# Altium PCB PCB_NewSim_2_2023-07-09.pcbdoc (part 2 of 3)
Units mil, origin at the board's own origin, x right, y up, seen from the top; angles counter-clockwise.
Board outline 6950 x 7613.07 mil, 2 copper layers (Top Layer, Bottom Layer); 120 components, 161 nets, 571 pads, 250 vias.
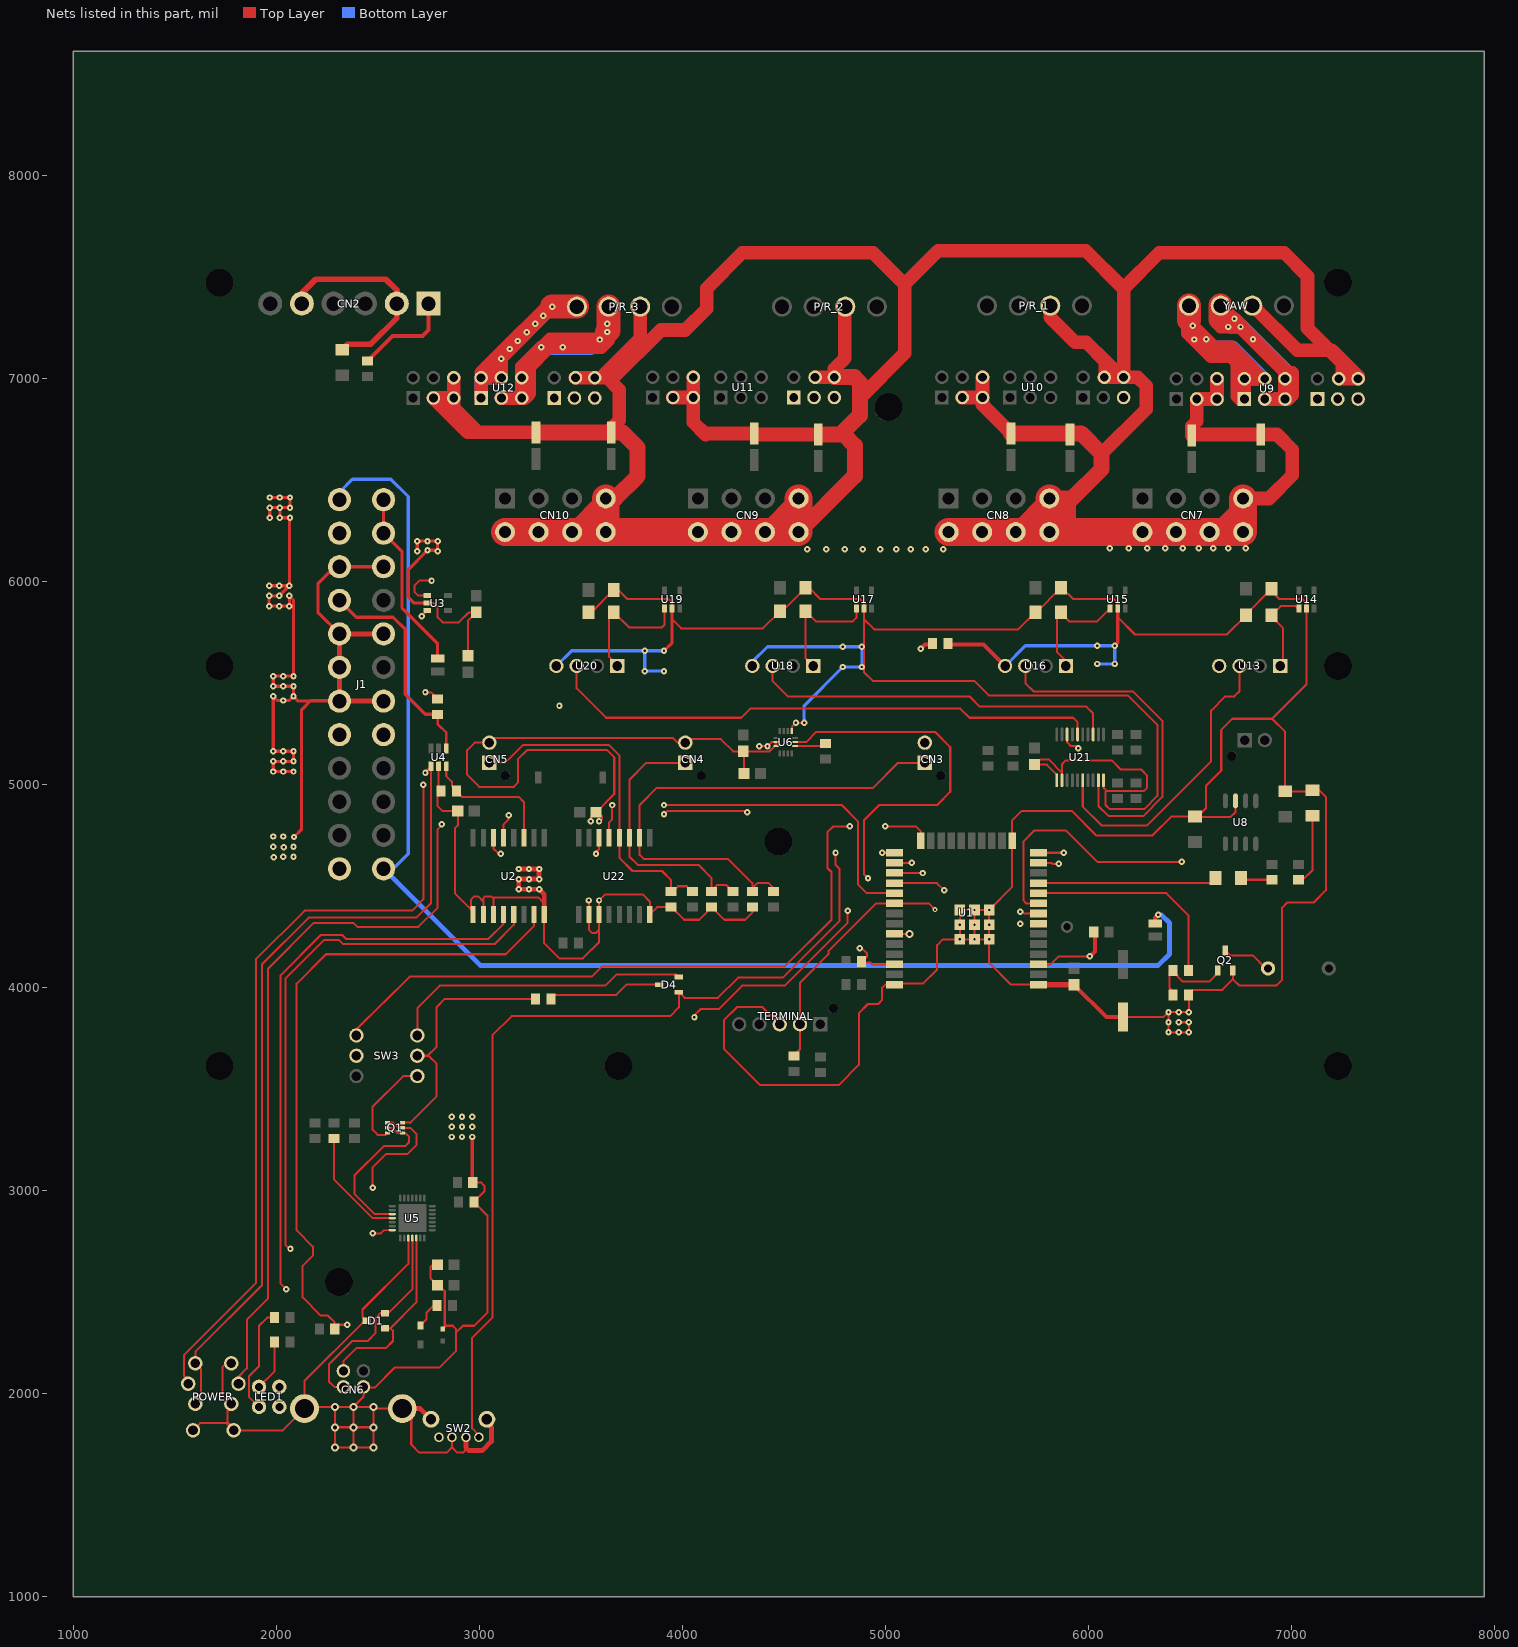
[diagram p2: the nets of this part, all layers, seen from the top]

## Via types
v1: diameter 31.5, hole 12, Top Layer to Bottom Layer, tented both sides, 239 vias
v2: diameter 39.37, hole 19.69, Top Layer to Bottom Layer, tented both sides, 10 vias
v3: diameter 24, hole 12, Top Layer to Bottom Layer, tented both sides, 1 vias

## Nets (pads, with @x,y where several pads share a name; then routed paths per layer and width w, separated by ;. In a path a pad name is that pad's centre, name@x,y a point inside that pad or via, vN(x,y) a via of type N, cw(c..) or ccw(c..) an arc to the next point about the centre after c; other vN are vias at no path point) (continued)
B_PR_PWM_A: U1.33 U11.13 | length 7931.2
  Top Layer w10: U1.33@5045.67,4265.49 v2(5120,4264.93)
  Mid-Layer 1 w10: U11.13@4549.06,6909.93 4549.06,6760.86 4610,6699.93 7220,6699.93 7320,6599.93 7320,5864.93 7390,5794.93 7390,5369.93 7315,5294.93 6710,5294.93 6640,5224.93 6640,4839.93 6560,4759.93 6460,4759.93 6250,4549.93 6250,3949.93 6195,3894.93 5905,3894.93 5785,4014.93 5370,4014.93 v2(5120,4264.93)
B_PR_PWM_B: U1.9 U11.15 | length 6853.5
  Top Layer w10: U1.9@5754.33,4415.5 5695,4414.93 5680,4429.93 5680,4719.93 5735,4774.93 5890,4774.93 6045,4619.93 v1(6460,4619.93)
  Mid-Layer 2 w10: U11.15@4649.06,6909.93 4649.06,6725.86 4745,6629.93 7085,6629.93 7200,6514.93 7200,5909.93 7040,5749.93 7040,5354.93 7085,5309.93 7175,5309.93 7225,5259.93 7225,4739.93 7095,4609.93 6470,4609.93 v1(6460,4619.93)
BUZZER: R25.2 U1.10 | length 1055.7
  Top Layer w10: U1.10@5754.33,4465.5 6384.4,4465.52 6493,4356.93 R25.2@6493.04,4084.93
C22_2: C22.2 U13.1 U14.1 | length 438
  Top Layer w10: U13.1@6945,5584.93 6960,5599.93 6960,5769.93 6902.7,5827.23 C22.2@6902.7,5834.93 6947.7,5879.93 7020,5879.93 7030.81,5869.11 U14.1@7037.6,5869.11
C24_2: C24.2 U15.1 U16.1 | length 582.7
  Top Layer w10: U16.1@5890,5584.93 5890,5609.93 5845,5654.93 5845,5829.73 C24.2@5865.2,5849.93 5865.2,5844.73 5905,5804.93 6043.41,5804.93 U15.1@6107.6,5869.11
C27_2: C27.2 U17.1 U18.1 | length 609.9
  Top Layer w10: U18.1@4645,5584.93 4607.7,5622.23 C27.2@4607.7,5854.93 4657.7,5804.93 4840,5804.93 4857.6,5822.52 U17.1@4857.6,5869.11
C29_2: C29.2 U19.1 U20.1 | length 658.7
  Top Layer w10: U20.1@3680,5584.93 3680,5589.93 3640,5629.93 3640,5827.23 C29.2@3662.7,5849.93 3737.7,5774.93 3900,5774.93 3912.6,5787.52 U19.1@3912.6,5869.11
C_OUT-A_PR: P/R_3.1 U12.7 U12.8 U12.10 | length 2637.3
  Top Layer w66.93: U12.7@3009.05,6904.93 U12.8@3009.05,7004.93 ; 3050.12,7070.05 3109.06,7011.11 U12.10@3109.05,7004.93 ; v1(3109.06,7097.57) 3109.06,7104.93 v1(3359.06,7354.93) ; P/R_3.1@3481.1,7354.93 3335,7354.93 3109.06,7128.98 ; U12.8@3009.05,7004.93 U12.10@3109.05,7004.93 ; U12.8@3009.05,7004.93 3009.06,7028.98 3109.06,7128.98 ; U12.8@3009.05,7004.93 U12.10@3109.05,7004.93 ; U12.10@3109.05,7004.93 3109.06,7128.98
  Top Layer w118.11: v1(3359.06,7354.93) P/R_3.1@3481.1,7354.93
  Bottom Layer w66.93: v1(3109.06,7097.57) U12.10@3109.05,7004.93 U12.8@3009.05,7004.93 ; P/R_3.1@3481.1,7354.93 v1(3359.06,7354.93) v1(3315.07,7310.94) v1(3275.74,7271.6) v1(3233.74,7229.6) v1(3189.74,7185.6) v1(3150.41,7146.27) U12.8@3009.05,7004.93 ; U12.8@3009.05,7004.93 U12.7@3009.05,6904.93 U12.8@3009.05,7004.93
C_OUT-B_PR: P/R_3.2 U12.9 U12.11 U12.12 | length 2999.3
  Top Layer w66.93: U12.9@3109.05,6904.93 U12.11@3209.05,6904.93 ; 3342.07,7154.93 3245,7057.86 3245,6924.93 3225,6904.93 U12.11@3209.05,6904.93 ; v1(3593.04,7192.97) 3591.09,7194.93 3350,7194.93 3310,7154.93 v1(3305,7154.93) ; U12.11@3209.05,6904.93 U12.12@3209.05,7004.93 3209.06,7058.98 v1(3305,7154.93) ; v1(3305,7154.93) 3549.14,7154.93 3637.1,7242.89 3637.1,7256.09 P/R_3.2@3637.1,7354.93 3635,7352.82 3635,7189.93 3600,7154.93 v1(3410.39,7154.93) v1(3305,7154.93)
  Top Layer w118.11: v1(3630,7229.93) 3637.1,7237.02 P/R_3.2@3637.1,7354.93
  Bottom Layer w66.93: U12.9@3109.05,6904.93 U12.11@3209.05,6904.93 U12.12@3209.05,7004.93 3209.06,7053.98 3305,7149.93 3550,7149.93 v1(3593.04,7192.97) v1(3630,7229.93) v1(3630,7270.52) 3630,7347.82 P/R_3.2@3637.1,7354.93
C_PR_PWM_A: U1.8 U12.13 | length 8583.6
  Top Layer w10: v1(5665,4374.93) 5675,4374.93 5685,4364.93 U1.8@5754.33,4365.5 5695,4364.93
  Mid-Layer 1 w10: U12.13@3369.1,6907.43 3369.1,6705.82 3430,6644.93 7185,6644.93 7260,6569.93 7260,5824.93 7335,5749.93 7335,5449.93 7285,5399.93 6720,5399.93 6530,5209.93 6530,4839.93 6430,4839.93 6185,4594.93 6185,3989.93 6155,3959.93 5945,3959.93 5730,4174.93 5730,4339.93 5690,4379.93 5670,4379.93 v1(5665,4374.93)
C_PR_PWM_B: U1.28 U12.15 | length 9178.4
  Top Layer w10: U1.28@5045.67,4515.49 5254.43,4515.49 v1(5290,4479.93)
  Mid-Layer 1 w10: U12.15@3469.1,6907.43 3469.1,6720.82 3510,6679.93 7200,6679.93 7290,6589.93 7290,5849.93 7365,5774.93 7365,5414.93 7290,5339.93 6710,5339.93 6610,5239.93 6610,4854.93 6550,4794.93 6455,4794.93 6215,4554.93 6215,3974.93 6175,3934.93 5920,3934.93 5650,4204.93 5650,4299.93 v1(5665,4314.93)
  Mid-Layer 2 w10: v1(5290,4479.93) 5310,4499.93 5575,4499.93 5615,4459.93 5615,4339.93 5640,4314.93 v1(5665,4314.93)
CN2_1: CN2.1 R6.1 | length 492.8
  Top Layer w19.68: R6.1@2450,7087.97 2571.96,7209.93 2720,7209.93 2749.73,7239.65 CN2.1@2749.73,7369.93
CN6_2: CN6.2 D1.1 U5.5 | length 931.6
  Top Layer w10: CN6.2@2330.79,2112.64 2330.79,2160.72 2395,2224.93 2540,2224.93 2575,2259.93 2575,2309.93 2562.4,2322.53 D1.1@2535.28,2322.52 2562.6,2322.53 2689.7,2450.22 2689.7,2746.03
CN6_3: CN6.3 D1.2 U5.4 | length 1025.3
  Top Layer w10: CN6.3@2330.79,2033.9 2286.03,2033.89 2260,2059.93 2260,2144.93 2375,2259.93 2450,2259.93 2490,2299.93 2490,2374.93 2512.4,2397.32 D1.2@2535.28,2397.33 2552.4,2397.32 2670,2514.93 U5.4@2669.99,2766.5
D4_2: D4.2 SW3.1 | length 1497.2
  Top Layer w10: SW3.1@2695,3764.93 2695,3899.93 2805,4009.93 3620,4009.93 3675,4064.93 3971.03,4064.93 D4.2@3983.62,4052.33
DAC2_AUDIO: C13.2 U1.11 | length 883.1
  Top Layer w10: U1.11@5754.33,4515.5 6602.87,4515.49 C13.2@6627.3,4539.93
DTR: Q1.2 Q1.4 U5.28 | length 956.3
  Top Layer w10: v1(2475,2789.93) 2515,2789.93 2530,2804.93 U5.28@2571.57,2805.82 ; v1(2475,3014.93) 2475,3114.93 2540,3179.93 2645,3179.93 2690,3224.93 2690,3279.93 2660,3309.93 Q1.2@2622.4,3309.93 2600,3309.93 2575,3334.93 Q1.4@2547.6,3335.51
  Mid-Layer 1 w10: v1(2475,2789.93) 2515,2829.93 2515,2999.93 2500,3014.93 v1(2475,3014.93)
ESP_EN: Q1.6 R3.1 SW3.3 U1.3 U3.1 | length 8000.7
  Top Layer w10: Q1.6@2547.6,3284.34 2538.2,3274.93 2500,3274.93 2475,3299.93 2475,3414.82 2624.9,3564.93 SW3.3@2695,3564.93 ; U3.1@2743.82,5932.33 2697.4,5932.32 2680,5949.73 2680,5979.93 2705,6004.93 v1(2765,6004.93) ; v1(4060,3854.93) 4060,3864.93 4090,3894.93 4180,3894.93 4295,4009.93 4505,4009.93 4815,4319.93 v1(4815,4379.93) ; U1.3@5754.33,4115.5 5815,4114.93 5855,4154.93 v1(6008.04,4154.93)
  Top Layer w19.68: v1(6008.04,4154.93) 6031.96,4178.85 R3.1@6031.96,4269.93
  Mid-Layer 1 w10: v1(2765,6004.93) 2920,5849.93 2920,4099.93 2880.5,4060.43 2680.5,4060.43 2605,3984.93 2605,3594.93 2635,3564.93 SW3.3@2695,3564.93 2805,3564.93 2840,3599.93 2840,3844.93 2890,3894.93 3465,3894.93 3505,3854.93 v1(4060,3854.93) ; v1(4815,4379.93) 4865,4429.93 5900,4429.93 6008.04,4321.89 v1(6008.04,4154.93)
EXT_5V: D2.1 R18.1 | length 142.7
  Top Layer w10: D2.1@2710,2336.09 2740,2366.09 2740,2399.93 2775,2434.93 R18.1@2791.96,2434.93
GND: C1.1 C2.1 C3.2 C4.2 C5.1 C6.1 C7.1 C8.1 C9.1 C10.2 C11.2 C12.2 C14.2 C15.2 C16.2 C17.2 C18.2 C19.2 C20.2 C21.2 C22.1 C23.2 C24.1 C25.2 C26.2 C27.1 C28.2 C29.1 C30.2 C31.2 C32.2 CN2.2 CN2.5 CN3.2 CN4.2 CN5.2 CN6.4 CN6.5 CN7.4 CN7.5 CN7.6 CN7.7 CN7.8 CN8.4 CN8.5 CN8.6 CN8.7 CN8.8 CN9.4 CN9.5 CN9.6 CN9.7 CN9.8 CN10.4 CN10.5 CN10.6 CN10.7 CN10.8 D1.3 D3.1 J1.3 J1.5 J1.7 J1.15 J1.17 J1.18 J1.19 J1.24 P/R_1.3 P/R_2.3 P/R_3.3 POWER.1 POWER.2 POWER.5 POWER.6 Q2.2 R13.1 R19.1 R20.1 R26.1 R36.1 R37.1 R38.1 R39.1 SW2.2 SW2.3 SW2.5 SW2.6 TERMINAL.3 U1.1 U1.15 U1.38 U1.39 U2.1 U2.2 U2.3 U2.8 U3.2 U4.2 U5.3 U6.1 U6.6 U6.7 U8.7 U9.3 U9.5 U9.6 U9.16 U9.18 U10.3 U10.5 U10.6 U10.16 U10.18 U11.3 U11.5 U11.6 U11.16 U11.18 U12.3 U12.5 U12.6 U12.16 U12.18 U13.4 U14.2 U15.2 U16.4 U17.2 U18.4 U19.2 U20.4 U21.1 U21.2 U21.10 U22.2 U22.3 U22.8 YAW.3 | length 79127.2
  Top Layer w10: POWER.6@1589.99,1819.97 1624.96,1854.92 1765,1854.92 1790,1829.92 POWER.5@1789.99,1819.97 ; POWER.1@1778.57,2149.89 1754.96,2149.89 1735,2129.93 1735,1993.47 POWER.2@1778.57,1949.88 1778.59,1933.52 1760,1914.92 1760,1849.96 POWER.5@1789.99,1819.97 ; U5.3@2650.29,2766.5 2650.3,2640.22 2425,2414.93 2425,2379.64 D1.3@2444.73,2359.93 2435,2359.93 2139.2,2064.12 CN6.5@2139.2,1927.2 ; U3.2@2743.82,5894.93 2775,5894.93 2795,5874.93 2795,5824.93 2820,5799.93 2900,5799.93 2949.45,5849.38 C5.1@2985,5849.37 2945,5809.38 C1.1@2945,5635.48 ; C7.1@2794.45,2634.93 2770,2634.93 2760,2624.93 2760,2569.38 C6.1@2794.45,2534.93 2800,2534.93 2830,2504.93 2830,2329.45 D3.1@2820,2319.45 ; U4.2@2800,5091.62 2800,4981.89 R13.1@2811.96,4969.93 2811.96,4956.89 2795,4939.93 2795,4894.93 2820,4869.93 C3.2@2894.45,4869.93 2894.4,4799.43 2880,4784.93 2880,4464.93 2970,4374.93 U2.1@2970,4360.95 ; D3.1@2820,2319.43 2835.5,2334.93 2870,2334.93 2885,2319.93 2885,2209.93 ; SW2.2@2865.55,1785.63 2865.55,1735.47 ; SW2.3@2934.44,1785.63 2934.45,1724.38 2920,1709.92 2891.1,1709.92 2865.55,1735.47 ; U2.1@2960,4384.93 2960,4434.93 2975,4449.93 2995,4449.93 3020,4424.93 U2.2@3020,4360.95 3020,4439.93 3030,4449.93 3060,4449.93 3070,4439.93 ; R19.1@2968.04,3039.93 3010,3039.93 3025,3024.93 3025,2996.12 R20.1@2973.04,2944.93 ; R20.1@2973.04,2944.93 3040,2877.97 3040,2399.93 2975,2334.93 2920,2334.93 2885,2299.93 2885,2209.93 ; U2.3@3070,4360.95 3070,4439.93 ; CN10.5@3126.97,6244.74 3292.32,6244.74 3457.68,6244.74 3623.03,6244.74 CN10.4@3623.03,6410.1 ; C29.1@3537.3,5849.93 3552.7,5849.93 C28.2@3662.7,5959.93 3685,5959.93 3730,5914.93 3930,5914.93 3950,5894.93 U19.2@3950,5869.11 3950,5814.93 3995,5769.93 4397.3,5769.93 C27.1@4482.3,5854.93 4492.7,5854.93 C26.2@4607.7,5969.93 4625,5969.93 4680,5914.93 4875,5914.93 4895,5894.93 U17.2@4895,5869.11 ; U22.2@3540,4360.95 3540,4284.93 3555,4269.93 3575,4269.93 3590,4284.93 U22.3@3590,4360.95 v1(3590,4429.93) 3620,4459.93 3805,4459.93 3840,4424.93 U22.8@3840,4360.95 ; U22.2@3540,4360.95 v1(3540,4429.93) ; v1(3550,4819.93) 3550,4839.32 C30.2@3575.55,4864.93 ; U22.3@3590,4360.95 3590,4224.93 3510,4144.93 3395,4144.93 3320,4219.93 U2.8@3320,4360.95 3320,4414.93 3290,4444.93 3075,4444.93 3070,4439.93 ; v1(3590,4819.93) 3605,4829.93 3605,4844.93 C30.2@3575.55,4864.93 ; CN10.8@3623,6244.73 CN9.5@4077,6244.77 CN9.6@4242.35,6244.77 CN9.7@4407.71,6244.77 CN9.8@4573.06,6244.77 CN9.4@4573.06,6410.12 ; U22.8@3840,4360.95 3875.94,4396.89 R38.1@3945,4396.88 3947,4396.93 4008.9,4334.93 4083,4334.93 R37.1@4145,4396.88 4206.96,4334.93 4310,4334.93 4345,4369.93 R36.1@4345,4396.88 ; C9.1@4304.45,5054.93 4304.45,5159.93 C8.1@4300,5164.37 ; v1(4380,5189.93) v1(4420,5189.93) 4440,5209.93 U6.6@4464.82,5209.93 U6.7@4464.82,5190.24 ; U6.6@4459.8,5209.93 4459.8,5194.73 4429.5,5164.43 C8.1@4300,5164.37 ; TERMINAL.3@4480,3819.93 4395,3904.93 4270,3904.93 4205,3839.93 4205,3699.93 4385,3519.93 4770,3519.93 4870,3619.93 4870,3874.93 4915,3919.93 4965,3919.93 4985,3939.93 4985,3999.93 5000.6,4015.53 U1.38@5045.67,4015.49 ; U6.1@4539.53,5264.94 4539.53,5284.45 v1(4560,5304.93) v1(4600,5304.93) ; U1.38@5045.67,4015.49 5050.1,4019.93 5185,4019.93 5255,4089.93 5255,4209.93 5283.6,4238.52 v1(5367.12,4238.52) ; U1.15@5625,4724.32 5625,4824.93 5670,4869.93 5920,4869.93 6040,4749.93 6315,4749.93 6407.7,4842.62 C11.2@6525,4842.62 ; U1.15@5624.99,4724.35 5625,4496.4 v1(5511.61,4383.02) ; U1.1@5754.33,4015.5 5619.43,4015.49 5511.61,4123.31 v1(5511.61,4238.52) ; U21.1@5844.84,5021.89 5844.84,5050.09 5795.55,5099.38 C31.2@5735,5099.37 5739.45,5099.38 5765,5124.93 5805,5124.93 5870,5059.93 U21.2@5870.43,5021.89 ; U21.2@5870.43,5021.89 5870.4,5100.32 5890,5119.93 6115,5119.93 6160,5074.93 6260,5074.93 6290,5044.93 6290,4984.93 6275,4969.93 6090,4969.93 ; U21.10@6075.16,5021.89 6075,4984.93 6090,4969.93 ; C32.2@6170,3855.2 6370.28,3855.21 v1(6395,3879.93) ; v1(6445,3829.93) v1(6495,3829.93) v1(6495,3779.93) v1(6445,3779.93) v1(6395,3779.93) v1(6395,3829.93) v1(6395,3879.93) ; Q2.2@6712.4,4085.72 6712.4,4042.32 ; U8.7@6725,4920.53 6725,4864.93 6700,4839.93 6527.7,4839.93 C11.2@6525,4842.62 ; POWER.5@1789.99,1819.97 2031.95,1819.95 CN6.5@2139.2,1927.2 ; CN6.5@2139.2,1927.2 2146.92,1934.92 v2(2290,1934.92) ; v2(2290,1834.92) v2(2380,1834.92) ; v2(2290,1834.92) v2(2290,1734.92) v2(2380,1734.92) ; v2(2290,1834.92) v2(2290,1934.92) ; v2(2290,1934.92) v2(2380,1934.92) ; v2(2380,1734.92) v2(2380,1834.92) ; v2(2380,1734.92) v2(2480,1734.92) v2(2480,1834.92) ; v2(2380,1834.92) v2(2380,1934.92) ; v2(2380,1834.92) v2(2480,1834.92) ; v2(2380,1934.92) 2429.21,1984.13 CN6.4@2429.21,2033.9 2433.2,2029.92 2485,2029.92 2585,2129.93 2805,2129.93 2885,2209.93 ; v2(2380,1934.92) v2(2480,1934.92) ; v2(2480,1834.92) v2(2480,1934.92) ; v2(2480,1934.92) 2487.72,1927.2 CN6.5@2620.8,1927.2 2665,1883.01 2665,1749.92 2705,1709.92 2840,1709.92 2865.55,1735.47 ; C30.2@3575.55,4864.93 3665,4954.43 3665,5134.93 3630,5169.93 3235,5169.93 3190,5124.93 3190,5009.93 3170,4989.93 3000,4989.93 2940,5049.93 2940,5169.93 2977.5,5207.43 CN5.2@3050,5207.43 3072.5,5229.93 3955,5229.93 3977.5,5207.43 CN4.2@4015,5207.43 4032.5,5224.93 4190,5224.93 4250.55,5164.38 C8.1@4300,5164.37 ; U17.2@4895,5869.11 4895,5554.93 4940,5509.93 5440,5509.93 5510,5439.93 6195,5439.93 6340,5294.93 6340,4944.93 6275,4879.93 6105,4879.93 6085,4899.93 6085,4964.93 6090,4969.93 ; U17.2@4895,5869.11 4895,5814.93 4945,5764.93 5654.8,5764.93 C24.1@5739.8,5849.93 5745.2,5849.93 C25.2@5865.2,5969.93 5870,5969.93 5925,5914.93 6125,5914.93 6145,5894.93 U15.2@6145,5869.11 6145,5824.93 6230,5739.93 6682.3,5739.93 C22.1@6777.3,5834.93 6777.3,5839.52 C23.2@6902.7,5964.93 6902.7,5952.23 6940,5914.93 7055,5914.93 7075,5894.93 U14.2@7075,5869.11 7075,5494.93 6905,5324.93 ; v1(5367.12,4238.52) v1(5367.12,4310.77) v1(5367.12,4383.02) v1(5439.37,4383.02) ; v1(5367.12,4238.52) v1(5439.37,4238.52) ; v1(5439.37,4238.52) v1(5511.61,4238.52) ; v1(5439.37,4238.52) v1(5439.37,4310.78) v1(5439.37,4383.02) ; v1(5439.37,4383.02) v1(5511.61,4383.02) ; v1(5511.61,4238.52) v1(5511.61,4310.77) v1(5511.61,4383.02) ; v1(6395,3879.93) v1(6445,3879.93) v1(6495,3879.93) 6495,3962.97 R26.1@6493.04,3964.93 6518.04,3989.93 6660,3989.93 6712.4,4042.32 ; C11.2@6525,4842.62 6537.7,4842.62 6580,4884.93 6580,4994.93 6655,5069.93 6655,5269.93 6710,5324.93 6905,5324.93 ; 6712.4,4042.32 6744.8,4009.93 6925,4009.93 6955,4039.93 6955,4394.93 6980,4419.93 7110,4419.93 7170,4479.93 7170,4939.93 7137.3,4972.62 C12.2@7105,4972.62 7100,4967.62 C10.2@6970,4967.62 6970,5259.93 6905,5324.93
  Top Layer w15.75: v1(1965,5979.93) v1(2015,5979.93) v1(2065,5979.93) ; v1(1967.85,6314.85) v1(1967.85,6364.85) v1(2017.85,6364.85) ; v1(1967.85,6414.85) v1(2017.85,6414.85) v1(2067.85,6414.85) v1(2067.85,6364.85) v1(2017.85,6364.85) ; v1(2085,5064.93) v1(2035,5064.93) v1(1985,5064.93) v1(1985,5114.93) v1(2035,5114.93) v1(2085,5114.93) v1(2085,5164.93) v1(2035,5164.93) v1(1985,5164.93) v1(1985,5434.93) 2005,5414.93 v1(2035,5414.93) 2065,5414.93 v1(2085,5434.93) ; v1(2087.5,4742.43) 2125,4779.93 2125,5369.93 2170,5414.93 2308.5,5414.93 J1.19@2311.5,5411.93 2108,5411.93 v1(2085,5434.93) ; J1.17@2311.5,5742.93 2205,5849.43 2205,5989.93 2289,6073.93 J1.15@2311.5,6073.93 J1.3@2528.5,6073.93 ; v1(2695,6149.93) v1(2695,6199.93) v1(2745,6199.93) v1(2795,6199.93) v1(2795,6149.93) 2790,6154.93 v1(2745,6154.93) 2650,6059.93 2650,5924.93 2680,5894.93 U3.2@2743.82,5894.93 ; v1(2965,3264.93) 2965,3042.97 R19.1@2968.04,3039.93 ; v1(3910,5659.93) 3950,5699.93 U19.2@3950,5869.11 ; v1(6130,5684.93) 6145,5699.93 U15.2@6145,5869.11 ; v1(2017.85,6364.85) v1(2017.85,6314.85) v1(2067.85,6314.85) 2065,6311.99 v1(2065,5979.93) ; v1(2065,5979.93) v1(2015,5929.93) v1(1965,5929.93) v1(1965,5879.93) v1(2015,5879.93) v1(2065,5879.93) v1(2065,5929.93) 2085,5909.93 v1(2085,5534.93) v1(2035,5534.93) v1(1985,5534.93) v1(1985,5484.93) v1(2035,5484.93) v1(2085,5484.93) v1(2085,5434.93)
  Top Layer w19.68: R39.1@5313.04,5689.93 5485,5689.93 U16.4@5590,5584.93 ; C2.1@5930,4014.37 6089.17,3855.21 C32.2@6170,3855.2
  Top Layer w23.62: J1.7@2528.5,5411.93 J1.19@2311.5,5411.93 J1.18@2311.5,5577.93 J1.17@2311.5,5742.93 J1.5@2528.5,5742.93 ; CN6.5@2620.8,1927.2 2709.22,1927.2 SW2.6@2762.2,1874.22 ; SW2.3@2934.44,1785.63 2934.45,1733.5 2948.02,1719.92 3015,1719.92 3060,1764.92 3060,1834.92 3037.8,1857.12 SW2.5@3037.79,1874.22 ; v1(3195,4584.93) v1(3245,4584.93) v1(3295,4584.93) v1(3295,4534.93) v1(3245,4534.93) v1(3195,4534.93) v1(3195,4484.93) v1(3245,4484.93) v1(3295,4484.93) 3320,4459.93 U2.8@3320,4360.95
  Top Layer w27.56: C4.2@2325,7142.62 2352.3,7169.93 2465,7169.93 2593.82,7298.74 CN2.2@2593.82,7369.93 ; U1.1@5754.33,4015.5 5755.45,4014.38 C2.1@5930,4014.37
  Top Layer w29.53: CN2.5@2126.11,7369.93 2126.11,7421.03 2195,7489.93 2540,7489.93 2595,7434.93 2595,7371.1 CN2.2@2593.82,7369.93
  Top Layer w66.93: U12.5@2874.05,6904.93 2874.1,6855.82 2995.4,6735.32 C20.2@3279.98,6735.3 2943.68,6735.31 U12.3@2774.05,6904.93 U12.5@2874.05,6904.93 ; U12.16@3474.05,7004.93 U12.18@3569.05,7004.93 ; U12.18@3569.05,7004.93 3600,7004.93 3793,7197.93 P/R_3.3@3793,7354.93 ; C21.2@3649.98,6735.3 3650,6754.93 3690,6794.93 3690,6944.93 3630,7004.93 U12.18@3569.05,7004.93 ; U11.3@3954.05,6907.43 U11.5@4054.05,6907.43 ; U11.6@4054.05,7007.43 U11.5@4054.05,6907.43 ; U11.16@4654.05,7007.43 U11.18@4749.05,7007.43 4749.06,7048.98 4800,7099.93 4800,7351.93 P/R_2.3@4803,7354.93 ; C18.2@4669.98,6725.3 4360,6725.31 C19.2@4354.98,6730.3 4120.38,6730.31 4115,6724.93 4054.06,6785.86 U11.5@4054.05,6907.43 ; 4875,6819.93 4875,6904.93 5095,7124.93 5095,7464.93 ; U10.3@5379.06,6907.43 U10.5@5479.06,6907.43 ; C17.2@5619.98,6730.3 5479.06,6871.24 U10.5@5479.06,6907.43 ; P/R_1.3@5813,7359.93 5813,7301.93 5935,7179.93 5990,7179.93 6085,7084.93 ; 6065,6629.93 6285,6849.93 6285,6964.93 6242.5,7007.43 U10.18@6174.05,7007.43 ; U9.6@6634.06,6999.93 U9.5@6634.06,6899.93 U9.3@6534.06,6899.93 6534.06,6789.93 6510,6765.86 C14.2@6509.98,6720.3 6515,6725.31 C15.2@6849.98,6725.3 6929.6,6725.32 7005,6649.93 7005,6524.93 6890,6409.93 CN7.4@6763.06,6410.12 ; YAW.3@6808,7359.93 6810,7359.93 7030,7139.93 7200,7139.93 7250,7089.93 ; U12.5@2874.05,6904.93 U12.6@2874.05,7004.93 U12.5@2874.05,6904.93 ; U12.18@3569.05,7004.93 3660,7004.93 3895,7239.93 4015,7239.93 4120,7344.93 4120,7444.93 4295,7619.93 4940,7619.93 5095,7464.93 ; 5095,7464.93 5260,7629.93 5988.12,7629.93 6174.06,7443.98 ; U10.5@5479.06,6907.43 U10.6@5479.06,7007.43 U10.5@5479.06,6907.43 ; 6085,7084.93 6162.5,7007.43 U10.18@6174.05,7007.43 ; 6085,7084.93 6085,7013.36 U10.16@6079.05,7007.43 U10.18@6174.05,7007.43 ; U10.18@6174.05,7007.43 6174.06,7443.98 ; 6174.06,7443.98 6350,7619.93 6965,7619.93 7080,7504.93 7080,7248.98 U9.18@7329.05,6999.93 ; 7250,7089.93 7329.06,7010.86 U9.18@7329.05,6999.93 ; 7250,7089.93 7250,7015.86 U9.16@7234.05,6999.93 U9.18@7329.05,6999.93
  Top Layer w78.74: C20.2@3279.98,6735.3 C21.2@3649.98,6735.3 3704.6,6735.32 3780,6659.93 3780,6519.93 3670.2,6410.12 CN10.4@3623,6410.12 ; CN10.7@3457.68,6244.74 CN10.4@3623.03,6410.1 ; CN9.7@4407.71,6244.77 CN9.4@4573.06,6410.12 ; CN9.8@4573.06,6244.77 4850,6521.72 4850,6669.93 4794.62,6725.3 C18.2@4669.98,6725.3 4780.38,6725.3 4875,6819.93 4875,6979.93 4847.5,7007.43 U11.18@4749.05,7007.43 ; C17.2@5619.98,6730.3 5964.62,6730.3 6065,6629.93 6065,6554.93 5920.2,6410.12 ; CN8.7@5642.71,6244.77 CN8.4@5808.06,6410.12 ; 5900,6319.93 5900,6389.93 5920.2,6410.12 ; CN7.7@6619.65,6234.57 CN7.4@6785,6399.93 ; CN8.4@5808.06,6410.12 5920.2,6410.12 ; CN8.4@5808.06,6410.12 5920.2,6410.12
  Top Layer w137.79: CN10.5@3126.97,6244.74 3292.32,6244.74 3457.68,6244.74 3623.03,6244.74 CN10.4@3623.03,6410.1 ; CN10.8@3623,6244.73 CN9.5@4077,6244.77 CN9.6@4242.35,6244.77 CN9.7@4407.71,6244.77 CN9.8@4573.06,6244.77 CN9.4@4573.06,6410.12 ; CN8.5@5312,6244.77 CN8.6@5477.35,6244.77 CN8.7@5642.71,6244.77 CN8.8@5808.06,6244.77 ; CN7.4@6763.06,6410.12 CN7.8@6763.06,6244.77 CN7.7@6597.71,6244.77 CN7.6@6432.35,6244.77 CN7.5@6267,6244.77 CN8.8@5808.06,6244.77 ; CN8.8@5808.06,6244.77 CN8.4@5808.06,6410.12 CN8.8@5808.06,6244.77
  Mid-Layer 1 w10: v1(4380,5189.93) 4380,5224.93 4460,5304.93 v1(4560,5304.93)
  Mid-Layer 2 w10: v1@2067.9,6414.82 2126.1,6473.02 CN2.5@2126.11,7369.93 ; J1.3@2528.5,6073.93 2865,6074.93 2900,6039.93 2895,5362.43 CN5.2@3050,5207.43 3062.5,5207.43 3175,5319.93 3902.5,5319.93 CN4.2@4015,5207.43 4015,5214.93 4140,5339.93 5062.5,5339.93 CN3.2@5195,5207.43 ; U20.4@3380,5584.93 3457.68,5662.6 CN10.7@3457.68,6244.74 ; v1(3540,4429.93) 3520,4449.93 3520,4779.93 3550,4809.93 v1(3550,4819.93) ; v1(3590,4429.93) 3600,4429.93 3630,4459.93 3630,4779.93 v1(3590,4819.93) ; U18.4@4345,5584.93 4407.71,5647.64 CN9.7@4407.71,6244.77 ; U16.4@5590,5584.93 5642.71,5637.64 CN8.7@5642.71,6244.77 ; CN7.7@6597.71,6244.77 6597.71,5632.22 U13.4@6645,5584.93
  Mid-Layer 2 w15.75: J1.3@2528.5,6073.93 2604.5,6149.93 v1(2795,6149.93) 2790,6154.93 v1(2745,6154.93) 2740,6149.93 v1(2695,6149.93) 2619,6073.93 J1.3@2528.5,6073.93
  Mid-Layer 2 w23.62: POWER.1@1778.57,2149.89 1870,2241.3 1870,4524.93 v1(1987.5,4642.43) 2032.5,4642.43 v1(2035,4644.93) v1(2037.5,4692.43) ; J1.24@2311.5,4585.93 2144,4585.93 v1(2085,4644.93) v1(2085,4694.93) ; v1(2037.5,4692.43) 1987.5,4692.43 v1(1985,4694.93) v1(1985,4744.93) v1(2035,4744.93) 2085,4744.93 v1(2087.5,4742.43) 2087.5,4697.43 v1(2085,4694.93) ; v1(2037.5,4692.43) 2040,4694.93 v1(2085,4694.93)
  Bottom Layer w15.75: U20.4@3380,5584.93 3455,5659.93 v1(3815,5659.93) ; v1(3910,5559.93) v1(3815,5559.93) v1(3815,5659.93) ; v1(3910,5659.93) v1(3815,5659.93) ; U18.4@4345,5584.93 4345,5604.93 4420,5679.93 v1(4790,5679.93) v1(4885,5679.93) v1(4885,5579.93) v1(4790,5579.93) 4600,5389.93 v1(4600,5304.93) ; U16.4@5590,5584.93 5690,5684.93 v1(6045,5684.93) v1(6130,5684.93) v1(6130,5594.93) v1(6045,5594.93)
  other v1: 2865,3264.93 2915,3264.93 2865,3314.93 2915,3314.93 2965,3314.93 2865,3364.93 2915,3364.93 2965,3364.93 4615,6159.93 4710,6159.93 4800,6159.93 4890,6159.93 4975,6159.93 5055,6159.93 5125,6159.93 5200,6159.93 5285,6159.93 6105,6164.93 6200,6164.93 6290,6164.93 6380,6164.93 6465,6164.93 6545,6164.93 6615,6164.93 6690,6164.93 6775,6164.93
GND1: 
GPIO0: D4.1 SW2.4 SW3.5 U1.25 | length 7104.2
  Top Layer w10: SW2.4@2998.42,1785.63 2998.4,1796.53 2965,1829.92 2965,2274.93 3065,2374.93 3065,3764.93 3160,3859.93 3940,3859.93 3983.6,3903.53 D4.1@3983.62,3977.52 4011.2,3949.93 4175,3949.93 4275,4049.93 4495,4049.93 4775,4329.93 4775,4584.93 4755,4604.93 v1(4755,4664.93) ; v1(4985,4664.93) U1.25@5045.67,4665.49
  Mid-Layer 1 w10: SW3.5@2395,3664.93 2310,3664.93 2285,3639.93 2285,3494.93 2410,3369.93 2410,2384.93 2500,2294.93 2765,2294.93 2895,2164.93 2895,1894.92 2998.4,1791.53 SW2.4@2998.42,1785.63 ; v1(4755,4664.93) v1(4985,4664.93)
GPIO2: SW3.4 U1.24 | length 3559.7
  Top Layer w10: SW3.4@2395,3764.93 2395.2,3795.72 2657.3,4054.93 3555,4054.93 3605,4104.93 4505,4104.93 4735,4334.93 4735,4569.93 4715,4589.93 4715,4764.93 4745,4794.93 v1(4825,4794.93) ; v1(5000,4794.93) 5150,4794.93 5175,4769.93 U1.24@5174.99,4724.35
  Mid-Layer 1 w10: v1(4825,4794.93) v1(5000,4794.93)
INT_ENC_EN: U1.29 U22.13 | length 1919.5
  Top Layer w10: U22.13@3640,4738.9 3640,4814.93 3655,4829.93 v1(3655,4899.93) ; v1(3910,4899.93) 4785,4899.93 4865,4819.93 4865,4509.93 4909.4,4465.52 U1.29@5045.67,4465.49
  Mid-Layer 1 w10: v1(3655,4899.93) v1(3910,4899.93)
INT_IO: U1.26 U2.13 | length 2493.1
  Top Layer w10: U2.13@3120,4738.9 3120,4804.93 3145,4829.93 v1(3145,4849.93) ; v1(3910,4854.93) 3925,4869.93 4320,4869.93 v1(4320,4864.93) ; U1.26@5045.67,4615.49 v1(5130,4614.93)
  Mid-Layer 1 w10: v1(3145,4849.93) 3210,4784.93 3845,4784.93 3910,4849.93 v1(3910,4854.93) ; v1(4320,4864.93) 5100,4864.93 5125,4839.93 5125,4619.93 v1(5130,4614.93)
J1_1: J1.1 J1.2 SW1.1 | length 891.8
  Top Layer w15.75: J1.1@2528.5,6403.93 J1.2@2528.5,6238.93 2620,6147.43 2620,5869.93 2795,5694.93 SW1.1@2795,5622.52
J1_12: J1.12 J1.13 SW4.1 | length 6716.3
  Top Layer w23.62: SW4.1@6330,4317.52 6330,4344.93 v1(6345,4359.93)
  Bottom Layer w15.75: J1.13@2311.5,6403.93 2311.5,6441.43 2375,6504.93 2565,6504.93 2650,6419.93 2650,4659.93 2576,4585.93 J1.12@2528.5,4585.93
  Bottom Layer w23.62: J1.12@2528.5,4585.93 3004.5,4109.93 6345,4109.93 6400,4164.93 6400,4319.93 6360,4359.93 v1(6345,4359.93)
J1_14: J1.14
J1_20: J1.20
LED_A: LED1.2 U2.4 | length 3323.8
  Top Layer w10: v1(2050,2514.93) 2020,2544.93 2020,4059.93 2220,4259.93 2325,4259.93 2345,4239.93 3045,4239.93 3120,4314.93 U2.4@3120,4360.95
  Mid-Layer 1 w10: LED1.2@2015,2034.14 2025,2044.13 2025,2494.93 2045,2514.93 v1(2050,2514.93)
LED_B: LED1.4 U2.5 | length 3498.3
  Top Layer w10: v1(2070,2714.93) 2065,2714.93 2045,2734.93 2045,4044.93 2235,4234.93 2310,4234.93 2330,4214.93 3075,4214.93 3170,4309.93 U2.5@3170,4360.95
  Mid-Layer 1 w10: LED1.4@2015,1935.71 1999.21,1935.71 1965,1969.92 1965,2609.93 v1(2070,2714.93)
MODEBTN: U1.7
MOTOR_ENABLE: R39.2 U1.27 U9.17 U10.17 U11.17 U12.17 | length 11788.7
  Top Layer w10: U1.27@5045.67,4565.49 v1(5185,4564.93)
  Top Layer w19.68: v1(5175,5669.93) 5195,5689.93 R39.2@5236.96,5689.93
  Mid-Layer 1 w7.87: U12.17@3569.06,6907.43 3565,6903.36 3565,6819.93 3620,6764.93 4390,6764.93 4460,6834.93 4460,6929.93 4485,6954.93 4715,6954.93 4749.06,6920.86 U11.17@4749.05,6907.43 ; U11.17@4749.05,6907.43 4749.1,6805.82 4805,6749.93 5235,6749.93 5280,6794.93 6120,6794.93 6174.1,6849.02 U10.17@6174.05,6907.43
  Mid-Layer 1 w10: U10.17@6174.05,6907.43 6301.6,6779.93 7310,6779.93 7330,6799.93 U9.17@7329.05,6899.93
  Mid-Layer 2 w10: U11.17@4749.05,6907.43 4751.6,6904.93 4795,6904.93 4845,6954.93 4845,7049.93 4795,7099.93 4540,7099.93 4475,7034.93 4475,6689.93 4630,6534.93 5045,6534.93 5165,6414.93 5165,5679.93 v1(5175,5669.93) 5505,5339.93 6335,5339.93 6530,5144.93 6530,4999.93 6685,4844.93 7060,4844.93 7120,4784.93 7120,4679.93 7080,4639.93 6535,4639.93 6500,4674.93 6130,4674.93 6015,4789.93 5715,4789.93 5475,4549.93 5190,4549.93 5185,4554.93 v1(5185,4564.93)
OUT-A_YAW: U9.7 U9.8 U9.10 YAW.1 | length 4286.3
  Top Layer w59.05: U9.8@6769.06,6999.93 U9.10@6869.06,6999.93 U9.8@6769.06,6999.93
  Top Layer w66.93: 6490,7291.02 6490,7224.93 v1(6521.64,7193.28) 6603.02,7111.91 6701.78,7111.91 ; YAW.1@6496.1,7359.93 6495,7358.82 6495,7259.93 v1(6515,7259.93) v1(6580.31,7194.61) 6620,7154.93 6705,7154.93 6769.1,7090.82 U9.8@6769.06,6999.93 ; 6658.77,7154.93 6735,7078.69 6735,6914.93 6750,6899.93 U9.7@6769.06,6899.93 ; 6769.06,7055.76 U9.8@6769.06,6999.93 ; 6769.06,7090.86 6860,6999.93 U9.10@6869.06,6999.93 U9.8@6769.06,6999.93 ; U9.7@6769.06,6899.93 U9.8@6769.06,6999.93 ; U9.7@6769.06,6899.93 U9.8@6769.06,6999.93
  Top Layer w118.11: 6495,7289.93 6496.1,7291.02 YAW.1@6496.1,7359.93
  Mid-Layer 1 w66.93: U9.7@6769.06,6899.93 U9.8@6769.06,6999.93 ; U9.8@6769.06,6999.93 U9.10@6869.06,6999.93 U9.8@6769.06,6999.93
  Mid-Layer 2 w66.93: YAW.1@6496.1,7359.93 6500,7356.02 6500,7244.93 6595,7149.93 6705,7149.93 6769.06,7085.86 ; U9.8@6769.06,6999.93 U9.7@6769.06,6899.93 U9.8@6769.06,6999.93 ; U9.8@6769.06,6999.93 6769.06,7085.86 ; U9.8@6769.06,6999.93 U9.10@6869.06,6999.93 ; U9.8@6769.06,6999.93 U9.10@6869.06,6999.93 ; 6769.06,7085.86 6855,6999.93 U9.10@6869.06,6999.93
  Bottom Layer w66.93: YAW.1@6496.1,7359.93 6496.1,7258.82 6600,7154.93 6710,7154.93 6769.1,7095.82 ; U9.7@6769.06,6899.93 U9.8@6769.06,6999.93 ; U9.8@6769.06,6999.93 6769.1,7095.82 ; U9.8@6769.06,6999.93 U9.10@6869.06,6999.93 ; U9.8@6769.06,6999.93 U9.10@6869.06,6999.93 ; 6769.1,7095.82 6865,6999.93 U9.10@6869.06,6999.93
OUT-B_YAW: U9.9 U9.11 U9.12 YAW.2 | length 3415.9
  Top Layer w66.93: 6652.1,7254.93 v1(6688.69,7254.93) v1(6750,7254.93) ; U9.9@6869.06,6899.93 U9.11@6969.06,6899.93 ; U9.12@6969.06,6999.93 6969.1,7035.82 v1(6750,7254.93) ; v1(6750,7254.93) v1(6811.31,7193.61) 6969.06,7035.86 U9.12@6969.06,6999.93 U9.11@6969.06,6899.93 ; v1(6750,7254.93) 6750,7264.93 v1(6720,7294.93) 6717.1,7294.93 YAW.2@6652.1,7359.93 6982.1,7029.93 7005,7029.93 7005,6919.93 6985,6899.93 U9.11@6969.06,6899.93
  Top Layer w118.11: 6652.1,7294.93 YAW.2@6652.1,7359.93
  Mid-Layer 2 w66.93: YAW.2@6652.1,7359.93 6655,7357.02 6655,7284.93 6700,7239.93 6765,7239.93 6969.06,7035.86 U9.12@6969.06,6999.93 U9.11@6969.06,6899.93 U9.9@6869.06,6899.93 6933.71,6899.93 6969.06,6935.27
  Bottom Layer w66.93: YAW.2@6652.1,7359.93 6655,7357.02 6655,7299.93 6700,7254.93 6760,7254.93 6969.1,7045.82 U9.12@6969.06,6999.93 ; U9.9@6869.06,6899.93 U9.11@6969.06,6899.93 U9.12@6969.06,6999.93
PAIRBTN: R7.1 SW2.1 U2.7 | length 4264
  Top Layer w10: R7.1@2288.04,2319.93 2288,2351.93 2255,2384.93 2220,2384.93 2130,2474.93 2130,2629.93 2180,2679.93 2180,2724.93 2100,2804.93 2100,4019.93 2245,4164.93 3130,4164.93 3270,4304.93 U2.7@3270,4360.95 ; R7.1@2288.04,2319.93 2308.04,2339.93 v1(2350,2339.93)
  Mid-Layer 1 w10: v1(2350,2339.93) 2350,2259.93 2370,2239.93 2760,2239.93 2850,2149.93 2850,1849.92 2801.6,1801.53 SW2.1@2801.57,1785.63
POWER_3: POWER.3 POWER.4 U3.3 U4.1 | length 4857
  Top Layer w10: POWER.4@1601.41,1949.88 1601.43,1971.36 1630,1999.92 1630,2121.32 POWER.3@1601.41,2149.89 1601.43,2206.36 1930,2534.93 1930,4114.93 2160,4344.93 2690,4344.93 2762.6,4417.52 U4.1@2762.6,5091.62 2735,5064.02 v1(2735,5059.93) ; v1@2715,5829.93 v1(2716.21,5829.93) U3.3@2743.82,5857.53
  Mid-Layer 1 w10: v1(2716.21,5829.93) 2775,5771.13 2775,5089.93 2745,5059.93 v1(2735,5059.93)
POWER_DOWN: R13.2 U2.11 U4.3 | length 669.4
  Top Layer w10: U4.3@2837.4,5091.62 2837.4,5042.52 2865,5014.93 2865,4992.97 R13.2@2888.04,4969.93 ; R13.2@2890,4964.93 2915,4939.93 3195,4939.93 3220,4914.93 U2.11@3220,4738.9
POWER_L2: POWER.L2 R14.2 | length 4325.2
  Top Layer w10: POWER.L2@1565.98,2049.88 1565.98,2068.95 1545,2089.93 1545,2189.93 1900,2544.93 1900,4139.93 2140,4379.93 2670,4379.93 2725,4434.93 v1(2725,4999.93) ; v1(2735,5454.93) 2763.04,5454.93 R14.2@2795,5422.97
  Mid-Layer 1 w10: v1(2725,4999.93) 2690,5034.93 2690,5419.93 2725,5454.93 v1(2735,5454.93)
POWER_OK: J1.8 POWER.L1 | length 4119.8
  Top Layer w10: POWER.L1@1814.01,2049.88 1814,2083.93 1855,2124.93 1855,2364.93 1960,2469.93 1960,4094.93 2185,4319.93 2380,4319.93 2400,4299.93 2700,4299.93 2795,4394.93 2795,4779.93 2820,4804.93 v1(2815,4804.93)
  Mid-Layer 2 w10: J1.8@2528.5,5246.93 2530.5,5244.93 2620,5244.93 2645,5219.93 2645,4974.93 v1(2815,4804.93)
PR_SWITCH_1: CN3.1 R8.1 R36.2 U22.10 | length 2550.6
  Top Layer w10: R8.1@4450,4472.93 4450,4489.93 4425,4514.93 4370,4514.93 4345,4489.93 4345,4472.93 4345,4514.93 4225,4634.93 3810,4634.93 3790,4654.93 U22.10@3790,4738.9 3790,4899.93 3875,4984.93 4940,4984.93 5062.5,5107.43 CN3.1@5195,5107.43
PR_SWITCH_2: CN4.1 R9.1 R37.2 U22.11 | length 1340.2
  Top Layer w10: CN4.1@4015,5107.43 3822.5,5107.43 3740,5024.93 U22.11@3740,4738.9 3740,4644.93 3780,4604.93 4080,4604.93 4145,4539.93 R37.2@4145,4472.93 ; R37.2@4145,4472.97 4145,4479.93 4170,4504.93 4218.04,4504.93 R9.1@4250,4472.97
PR_SWITCH_3: CN5.1 R10.1 R38.2 U22.12 | length 1686.9
  Top Layer w10: CN5.1@3050,5107.43 3127.5,5107.43 3215,5194.93 3640,5194.93 3690,5144.93 U22.12@3690,4738.9 3690,4639.93 3755,4574.93 3900,4574.93 3945,4529.93 R38.2@3945,4472.93 ; R38.2@3945,4472.97 3953.04,4472.97 3980,4499.93 4023.04,4499.93 R10.1@4050,4472.97
PS_ON: J1.16 R14.1 U4.4 | length 1089.5
  Top Layer w11.81: R14.1@2795,5346.88 2795,5299.93 2837.4,5257.52 U4.4@2837.4,5178.23
  Top Layer w15.75: J1.16@2311.5,5907.93 2394.5,5824.93 2575,5824.93 2635,5764.93 2635,5444.93 2733,5346.93 R14.1@2795,5346.88
PWM-A_YAW: U1.13 U9.13 | length 4361.7
  Top Layer w10: U1.13@5754.33,4615.5 5820,4614.93 5825,4609.93 v1(5855,4609.93)
  Mid-Layer 2 w10: v1(5855,4609.93) 5830,4634.93 5830,4679.93 5855,4704.93 5910,4704.93 6170,4444.93 7150,4444.93 7375,4669.93 7375,6729.93 7325,6779.93 7170,6779.93 7130,6819.93 U9.13@7130,6899.93
PWM-B_YAW: U1.14 U9.15 | length 4259.9
  Top Layer w10: U1.14@5754.33,4665.5 5754.9,4664.93 v1(5880,4664.93)
  Mid-Layer 2 w10: v1(5880,4664.93) 6140,4404.93 7165,4404.93 7410,4649.93 7410,6779.93 7370,6819.93 7250,6819.93 7230,6839.93 U9.15@7230,6899.93
Q2_1: Q2.1 R25.1 R26.2 | length 412.4
  Top Layer w10: R26.2@6416.96,3964.93 6416.96,3982.97 6400,3999.93 6400,4067.97 R25.1@6416.96,4084.93 6440,4061.89 6440,4054.93 6465,4029.93 6595,4029.93 6637.6,4072.53 Q2.1@6637.6,4085.72
Q2_3: BUZZER1.2 Q2.3 | length 247.3
  Top Layer w10: Q2.3@6675,4184.12 6699.2,4159.93 6810,4159.93 6875,4094.93 BUZZER1.2@6885.39,4094.92
R11_1: LED1.3 R11.1 | length 534.2
  Top Layer w10: LED1.3@1915,1935.71 1865,1985.71 1865,2084.93 1915,2134.93 1915,2334.93 1955,2374.93 R11.1@1991.96,2374.93
R12_1: LED1.1 R12.1 | length 252.7
  Top Layer w10: LED1.1@1915,2034.14 1991.96,2111.09 R12.1@1991.96,2254.93
R21_1: Q1.3 R21.1 SW3.2 | length 1305.2
  Top Layer w10: Q1.3@2622.4,3335.51 2660,3334.93 2790,3464.93 2790,3624.93 2750,3664.93 SW3.2@2695,3664.93 2745,3664.93 2790,3709.93 2790,3904.93 2830,3944.93 R21.1@3276.96,3944.93
R21_2: D4.3 R21.2 | length 562.3
  Top Layer w10: R21.2@3353.04,3944.93 3373.04,3964.93 3674.99,3964.93 3724.99,4014.93 D4.3@3886.37,4014.93
R24_1: R24.1 U6.12 | length 155.1
  Top Layer w10: U6.12@4555.18,5190.24 4692.27,5190.23 R24.1@4705,5202.97
R27_1: C12.1 R27.1 | length 357.2
  Top Layer w10: R27.1@7035,4531.88 7057,4531.93 7105,4579.93 C12.1@7105,4847.23
R28_1: C13.1 R28.1 | length 155.6
  Top Layer w10: C13.1@6752.7,4539.93 6760.74,4531.89 R28.1@6905,4531.88
RTS: Q1.1 Q1.5 U5.24 | length 807.5
  Top Layer w10: Q1.5@2547.6,3309.93 2570,3309.93 2595.59,3284.34 Q1.1@2622.4,3284.34 ; U5.24@2571.57,2884.62 2485.3,2884.62 2385,2984.93 2385,3074.93 2530,3219.93 2635,3219.93 2655,3239.93 2655,3264.93 2635.6,3284.32 Q1.1@2622.4,3284.34
RXD: R15.2 U5.25 | length 567.3
  Top Layer w10: R15.2@2285,3256.88 2285,3054.93 2475,2864.93 U5.25@2571.57,2864.92
S$18: 
S$23: 
S$25: 
S$27: 
S$30: 
S$35: 
S$37: 
S$39: 
S$41: 
S$408015: 
SCL_6DOF: R5.2 TERMINAL.2 U1.30 U6.13 | length 3476.4
  Top Layer w10: R5.2@4550,3667.97 4580,3697.97 TERMINAL.2@4580,3819.93 4580,4024.93 4720,4164.93 4720,4179.93 4955.6,4415.52 U1.30@5045.67,4415.49 ; U6.13@4555.18,5209.93 4610,5209.93 4660,5259.93 4743,5259.93 5245,5259.93 5320,5184.93 5320,4964.93 5255,4899.93 4970,4899.93 4895,4824.93 4895,4559.93 v1(4915,4539.93) ; U1.30@5045.67,4415.49 5214.43,4415.49 v3(5245,4384.93)
  Mid-Layer 2 w10: v1(4915,4539.93) 4915,4529.93 4970,4474.93 5205,4474.93 5265,4414.93 5265,4404.93 v3(5245,4384.93)
SCL_ENC_RESET: R2.1 U1.36 U2.14 U21.18 U22.14 | length 6138.2
  Top Layer w10: U2.14@3070,4738.9 3070,4684.93 3095,4659.93 v1(3105,4659.93) ; v1(3575,4659.93) 3575,4667.15 3590,4682.15 U22.14@3590,4738.9 ; v1(4875,4194.93) 4885,4194.93 4910,4169.93 4910,4151.89 R2.1@4883.04,4124.93 ; R2.1@4883,4124.93 4925,4124.93 4935,4114.93 U1.36@5045.67,4115.49 ; U21.18@5896.02,5247.96 5896.02,5208.9 5915,5189.93 5940,5189.93 v1(5950,5179.93)
  Mid-Layer 1 w10: v1(3395,5389.93) 3395,5299.93 3260,5164.93 3260,5009.93 3195,4944.93 3125,4944.93 3080,4899.93 3080,4684.93 v1(3105,4659.93) v1(3575,4659.93) 3625,4609.93 4310,4609.93 4650,4269.93 4800,4269.93 v1(4875,4194.93)
  Mid-Layer 2 w10: v1(3395,5389.93) 3425,5419.93 5120,5419.93 5400,5139.93 5920,5139.93 5950,5169.93 v1(5950,5179.93)
SCL_PR_A: U16.3 U21.9 | length 1713.9
  Top Layer w10: U16.3@5690,5584.93 5690,5499.93 5730,5459.93 6220,5459.93 6365,5314.93 6365,4939.93 6270,4844.93 6100,4844.93 6049.6,4895.32 U21.9@6049.57,5021.89
SCL_PR_B: U18.3 U21.13 | length 1822.9
  Top Layer w10: U18.3@4445,5584.93 4445,5509.93 4520,5434.93 5415,5434.93 5465,5384.93 5990,5384.93 6024,5350.93 U21.13@6024,5247.93
SCL_PR_C: U20.3 U21.16 | length 2743.5
  Top Layer w10: U20.3@3480,5584.93 3480,5474.93 3625,5329.93 4290,5329.93 4335,5374.93 5370,5374.93 5415,5329.93 5925,5329.93 5947.2,5307.73 U21.16@5947.2,5247.93
SCL_YAW: U13.3 U21.6 | length 1485
  Top Layer w10: U21.6@5972.8,5021.89 5972.8,4892.12 6065,4799.93 6290,4799.93 6605,5114.93 6605,5364.93 6675,5434.93 6720,5434.93 6745,5459.93 U13.3@6745,5584.93